# Altium PCB UKU202045.PcbDoc (part 2 of 3)
Units mm, origin at the board's own origin, x right, y up, seen from the top; angles counter-clockwise.
Board outline 319.2 x 161.95 mm, 2 copper layers (Top Layer, Bottom Layer); 290 components, 381 nets, 912 pads, 545 vias.
Unrouted connection lines stored in the file: 1.
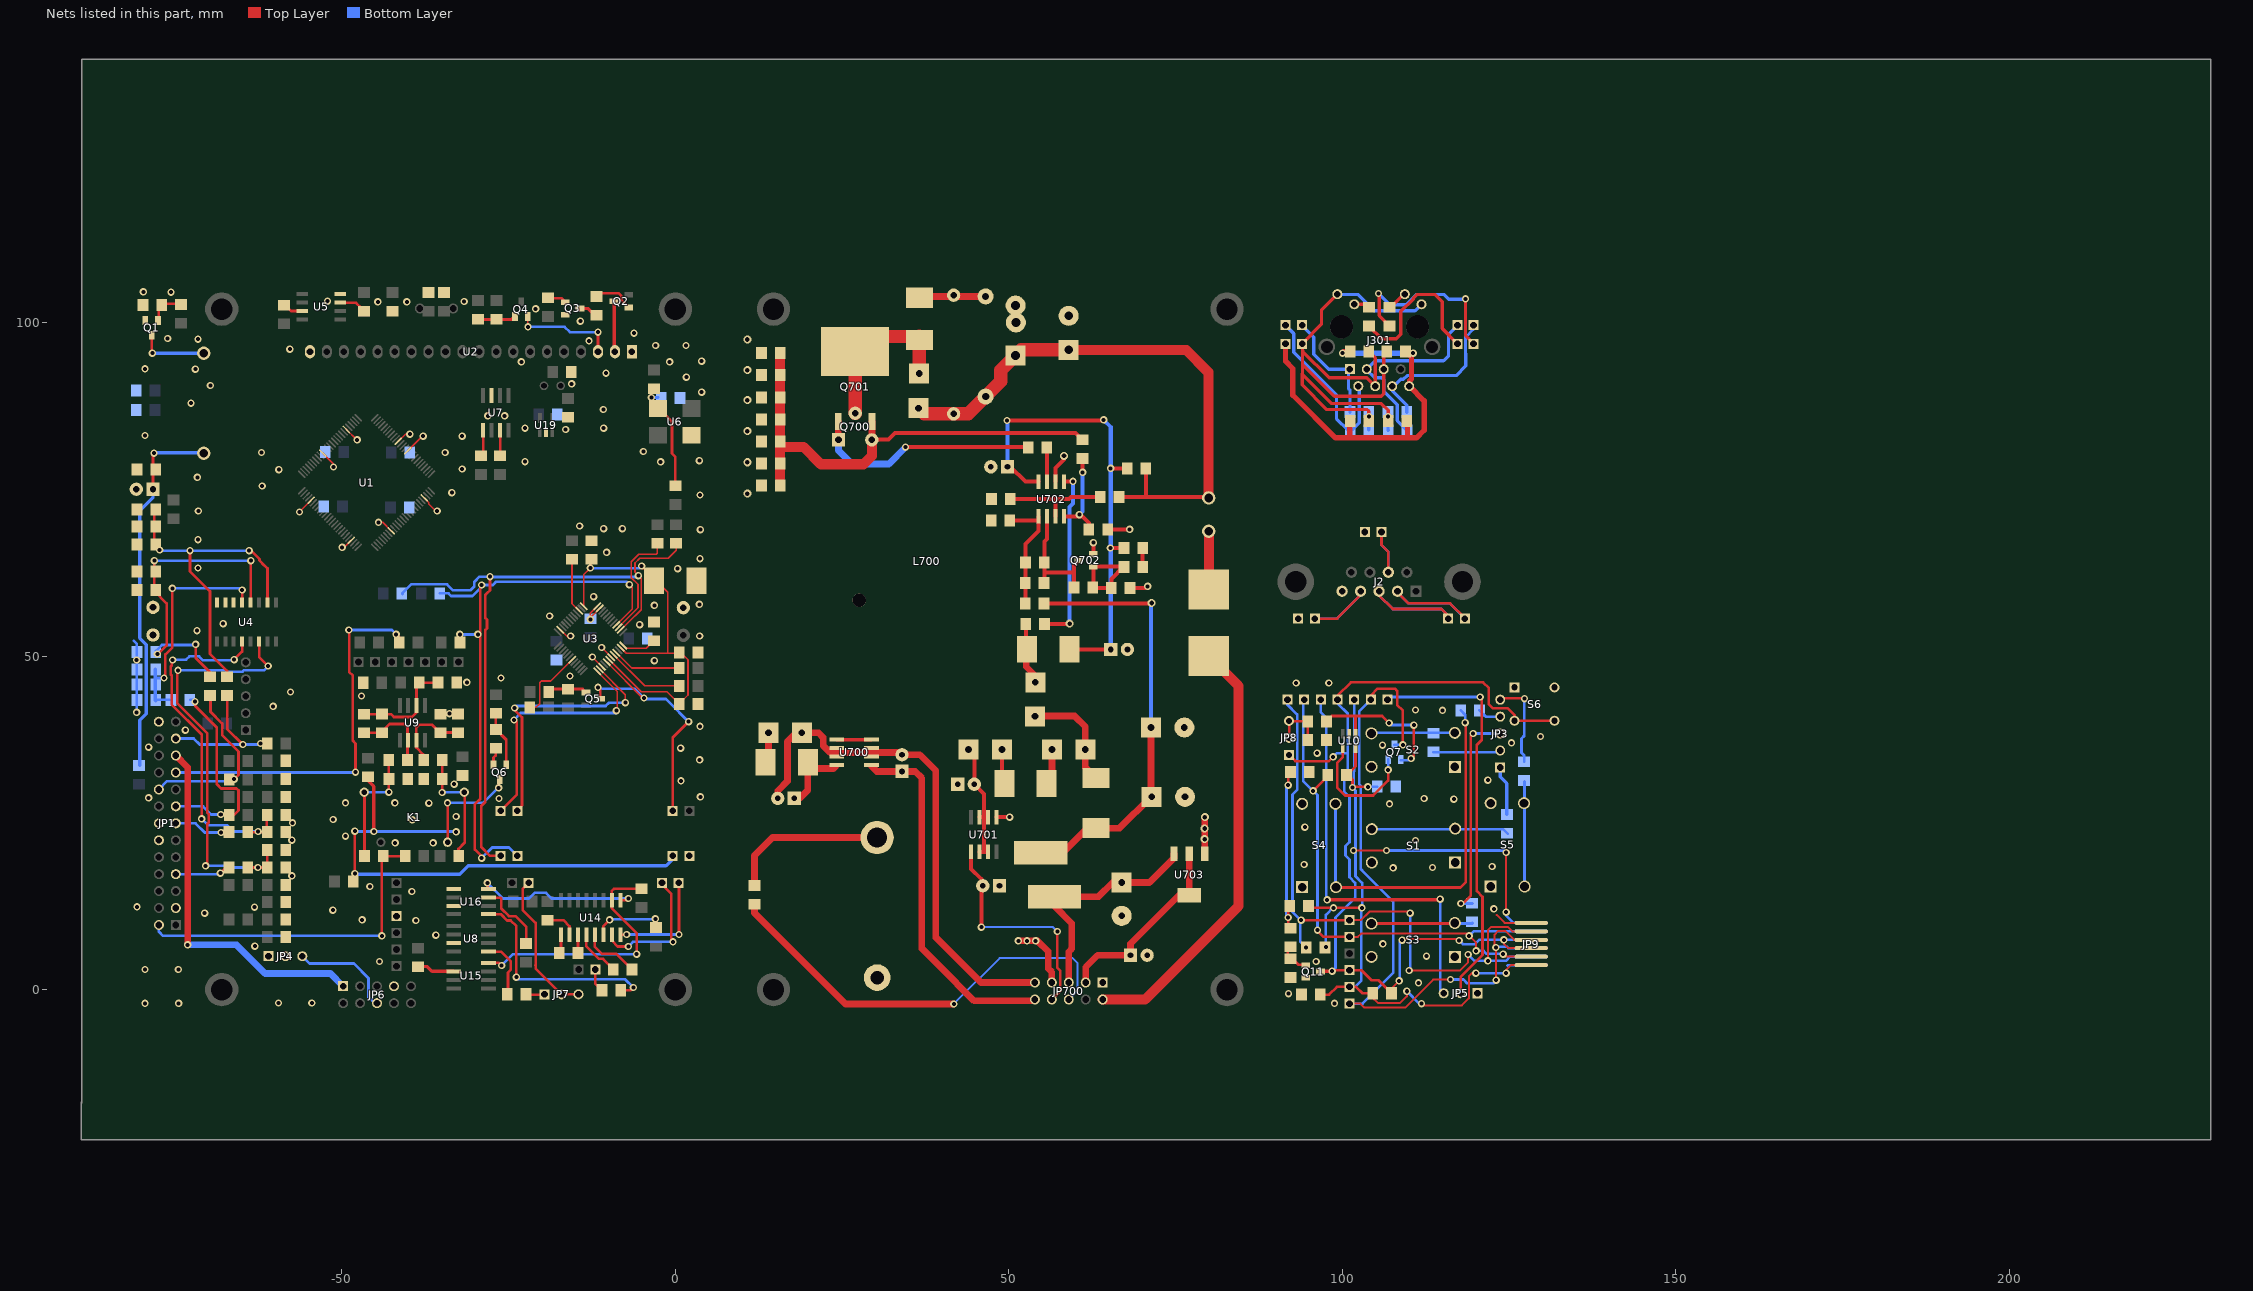
[diagram p2: the nets of this part, all layers, seen from the top]

## Via types
v1: diameter 1.1, hole 0.6, Top Layer to Bottom Layer, 521 vias
v2: diameter 1.2, hole 0.7, Top Layer to Bottom Layer, 12 vias
v3: diameter 1.5, hole 0.95, Top Layer to Bottom Layer, 12 vias

## Nets (pads, with @x,y where several pads share a name; then routed paths per layer and width w, separated by ;. In a path a pad name is that pad's centre, name@x,y a point inside that pad or via, vN(x,y) a via of type N, cw(c..) or ccw(c..) an arc to the next point about the centre after c; other vN are vias at no path point) (continued)
-IAKB: JP1.2 R61.2 R62.2 | length 49.9
  Top Layer w0.4: v1(-44,8.05) -44,19.8 R61.2@-43.85,19.95 ; R61.2@-43.809,19.996 -40.554,19.996 R62.2@-40.55,20
  Bottom Layer w0.4: JP1.2@-77.42,9.685 -77.42,8.67 -76.8,8.05 v1(-44,8.05)
-UOUT: JP1.21 JP6.1 | length 55
  Top Layer w1: JP1.21@-74.9,35.1 -74.895,35.1 JP1.21@-74.88,35.085 -73.1,33.305 v1(-73.1,6.7)
  Bottom Layer w1: v1(-73.1,6.7) -65.8,6.7 -61.5,2.4 -51.7,2.4 JP6.1@-49.8,0.5
AIN2U: 
C0: JP1.14
DT1: JP1.23 R8.2 R17.1 | length 22.6
  Top Layer w0.4: R8.2@-67.197,44.097 -67.197,39.097 v1(-64.85,36.75) ; v1(-62.2,36.9) -62.197,36.903 R17.1@-61.197,36.903
  Bottom Layer w0.4: JP1.23@-74.9,37.6 -74.902,37.603 -74.95,37.65 JP1.23@-74.9,37.65 ; JP1.23@-74.875,37.625 -74.877,37.628 JP1.23@-74.9,37.65 ; v1(-62.2,36.9) -62.35,36.75 v1(-64.85,36.75) -71.3,36.75 -72.2,37.65 -74.88,37.65 JP1.23@-74.9,37.65
DT1U: C6.1 D3.2 R8.1 R26.2 U4.2 | length 51.3
  Top Layer w0.4: R26.2@-78.05,72.05 -78.1,72.05 -78.1,72.003 -78.1,69.388 -78.1,67.05 -77.825,66.775 -77.125,66.075 v1@-77,65.95 ; v1(-72.75,65.8) -72.75,62.7 -69.75,59.7 -69.75,50.3 -67.197,47.747 R8.1@-67.197,46.897 R8.1@-67.25,46.897 ; v1(-63.9,65.8) -63.6,65.8 -62.35,64.55 -62.35,64.35 -61.15,63.15 -61.15,63.1 ; -61.95,63.9 -61.15,63.1 ; U4.2@-61.1,57.95 -61.15,58 -61.15,58.025 -61.15,63.1
  Bottom Layer w0.4: v1@-77,65.95 -76.85,65.8 v1(-72.75,65.8) v1(-63.9,65.8)
  other v1: -77.3,65.9
DT2: JP1.18 R9.2 R18.1 | length 26.5
  Top Layer w0.4: R9.2@-69.697,44.097 -69.697,41.647 -67.95,39.9 -67.95,38.15 -65.5,35.7 -65.5,32.2 v1(-66.15,31.55)
  Bottom Layer w0.4: JP1.18@-77.425,30 -76.175,31.25 -66.45,31.25 v1(-66.15,31.55)
DT2U: C7.1 D4.2 R9.1 R27.2 U4.4 | length 49.6
  Top Layer w0.4: v1(-78.1,64.3) -78.1,62.688 -78.1,62.25 -78.105,62.25 -78.105,59.9 -78.105,59.755 -78.075,59.725 -76.25,57.9 -76.25,51.6 -77.5,50.35 -77.65,50.35 v1@-77.7,50.35 ; v1(-71.9,51.75) -71.9,49.7 -69.697,47.497 -69.697,46.897 R9.1@-69.697,46.85 ; R9.1@-69.65,46.8 R9.1@-69.65,46.897 ; U4.4@-63.665,58.025 v1(-63.65,64.3) -63.65,63.3
  Bottom Layer w0.4: v1(-78.1,64.3) v1(-63.65,64.3) ; R27.2@-77.9,50.75 -77.9,50.7 -77,51.6 -77,51.65 -72,51.65 v1(-71.9,51.75)
  other v1: -77.65,50.3
DTAKB: JP1.15 R11.2 R19.1 | length 31.5
  Top Layer w0.4: v1(-72,43.15) -71.997,42.547 -68.75,39.3 -68.75,30.8 -68.1,30.15 -65.8,30.15 -65.5,29.85 ; v1@-68.2,26.2 v1@-68.197,26.203 ; v1(-68.15,26.25) v1@-68.197,26.203 ; -65.5,29.9 -65.5,29.85 ; v1@-68.197,26.203 -68.15,26.203 R19.1@-66.897,26.203 -66.147,26.203 -65.5,26.85 -65.5,29.85
  Bottom Layer w0.4: JP1.15@-74.88,27.465 -70.815,27.465 -69.6,26.25 v1(-68.15,26.25) ; R11.2@-72.7,43.45 -72.3,43.45 v1(-72,43.15)
DTAKBU: C8.1 D5.2 R11.1 R28.2 U4.5 | length 34.9
  Top Layer w0.4: v1(-76.65,46.7) v1@-76.6,46.75 ; v1@-76.55,46.75 v1@-76.6,46.75 ; v1(-75.4,60.15) -75.4,51.3 -76.45,50.25 -76.45,46.9 -76.575,46.775 v1@-76.6,46.75 ; U4.5@-65,57.9 U4.5@-64.95,57.95 ; U4.5@-64.95,58.025 v1(-64.95,59.9)
  Bottom Layer w0.4: C8.1@-77.95,43.45 -77.903,43.45 -75.7,43.45 R11.1@-75.65,43.4 ; -77.95,46.7 -77.905,46.7 v1@-76.7,46.7 ; v1(-75.4,60.15) -65.2,60.15 v1(-64.95,59.9)
  Bottom Layer w0.5: R28.2@-77.95,48.05 -77.95,47.997 -77.95,46.7 -77.95,45.712 -77.95,43.45 -77.95,43.403 -77.95,43.35 C8.1@-77.9,43.3
GND: C1.2 C2.2 C3.2 C4.2 C5.2 C6.2 C7.2 C8.2 C9.2 C10.2 C11.2 C12.2 C13.2 C14.2 C15.1 C16.1 C17.1 C18.2 C19.2 C20.2 C21.1 C22.1 C23.2 C24.1 C25.1 C31.1 C33.1 C35.2 C37.1 C38.1 C39.1 C40.1 C41.1 C42.2 D3.1 D4.1 D5.1 D7.1 JP1.3 JP1.12 JP1.26 JP4.1 JP6.7 pad.4 pad.9@-78.3,53.15 pad.9@-78.3,57.3 Q1.2 Q3.2 Q6.2 R12.2 R13.2 R15.2 R16.2 R23.1 R24.1 R26.1 R27.1 R28.1 R36.1 R49.1 R57.1 R58.1 R60.1 U1.11 U1.15 U1.31 U1.41 U1.55 U1.72 U1.83 U1.97 U2.1 U2.20 U3.15 U3.19 U3.35 U3.36 U3.47 U4.6 U4.7 U4.8 U5.4 U6.2 U7.3 U8.7 U16.5 U16.7 U19.2 X17.1 | length 43.8
  Top Layer w0.2: U1.41@-52.841,80.419 -51.25,78.829 v1(-51.25,78.35)
  Top Layer w0.25: v1(-56.35,71.6) -56.35,71.607 U1.55@-54.608,73.348 ; v1(-49.95,66.3) -49.636,66.3 U1.72@-48.598,67.338 ; U1.31@-49.305,83.955 -47.75,82.4 v1(-47.7,82.4) ; v1(-44.5,70.05) -43.885,70.05 U1.83@-42.587,68.752 ; U1.15@-41.527,82.187 -40.464,83.25 v1(-39.8,83.25) ; U1.11@-40.113,80.773 -37.936,82.95 v1(-37.8,82.95) ; U1.97@-37.638,73.702 -36.95,73.014 -36.95,72.8 -35.9,71.75 v1(-35.7,71.75) ; U3.47@-17.254,53.948 -16.006,52.7 v1@-15.9,52.7 ; v1@-12.75,55.45 v1(-12.75,55.5) v1@-12.75,55.731 ; v1@-12.449,49.85 U3.15@-10.997,48.398 ; U3.36@-11.704,57.484 -12.75,56.438 v1@-12.75,55.731 ; U3.35@-11.35,57.13 v1@-12.75,55.731 ; v1@-11.05,51.3 v1(-11.05,51.279) U3.19@-9.582,49.812
  Top Layer w0.4: Q6.2@-27.254,33.696 -27.254,34.796 -26.95,35.1 R58.1@-26.95,35.9
  Bottom Layer w0.4: -81.2,52.3 -80.75,51.85 -80.75,50.597 v1(-80.75,49.4) -80.75,47.997 -80.75,45.712 -80.75,43.403 v1(-80.75,41.55) ; C13.2@-12.8,55.55 -12.775,55.525 v1(-12.75,55.5) ; v1(-11.05,51.279) v1@-11.029,51.3
  other v1: -79.499,-2.05 -74.45,-2.05 -59.5,-2 -54.5,-2 -79.5,3 -74.5,3 -44.35,4.2 -63.05,6.5 -35.9,8.15 -38.9,10.35 -46.95,10.45 -70.55,11.45 -51.35,11.9 -63.099,12.35 -80.699,12.4 -39.5,14.7 -45.8,15.45 -57.5,17.05 -42,22 -36.3,22 -57.5,22.4 -49.45,23 -57.4,25 -39.45,25.45 -51.3,25.5 -32.85,25.95 -36.95,27.95 -49.45,28 -42.05,28 -26.45,28.65 -78.95,28.75 3.75,28.9 -33.15,30.8 0.85,31.3 3.65,34.45 0.8,36.2 -78.95,36.35 -73.45,38.9 3.7,39.45 -33.85,41.35 -60.299,42.45 -47.05,44 -57.7,44.6 -31.25,46.05 -26.15,46.7 -15.8,47 -3.15,49.3 -12.45,49.85 -15.7,53 3.65,53 -71.7,53.8 -5.35,54.7 -67.8,54.85 -18.85,56 -3.15,57.6 3.6,57.75 -12.25,58.9 0.35,63.1 -71.55,63.2 3.7,64.6 -10.3,65.55 -71.55,67.45 3.75,68.95 -10.75,69.1 -7.95,69.1 -14.35,69.5 -71.5,71.75 3.7,74.15 -33.5,74.5 -61.95,75.5 -71.65,76.8 -59.45,77.95 -31.95,78.05 -2.2,79.1 -22.55,79.15 3.6,79.3 -62.05,80.5 -34.5,80.5 -4.8,80.65 -31.95,82.95 -79.5,83.05 -16.45,83.95 -22.55,84.15 -10.75,84.15 -28.1,86 -25.6,86 -10.8,86.95 -72.6,87.9 3.95,89.55 -69.7,90.55 -15.55,90.8 1.65,91.8 -10.4,92.4 -71.95,93 -79.5,93.05 -23.1,94.1 -0.85,94.1 3.95,94.2 -57.8,96 -2.95,96.55 1.6,96.55 -12.95,97.25 -71.55,97.5 -76.099,97.6 -6.2,98.4 -14.25,100.2 -20.95,102.05 -44.6,103.1 -40.25,103.1 -31.65,103.15 -52.15,103.2 -75.6,104.55 -79.75,104.6
GND_P: BT700.2 C702.2 C703.2 C704.1 C705.1 C706.2 C710.2 C711.2 C712.2 C714.2 C715.2 D702.2 JP700.1 JP700.7 L700.7 pad.0@51.05,100 pad.1 Q702.2 R707.1 R709.1 R710.2 R711.2 R712.2 R713.2 R714.2 R715.2 R716.2 R717.1 U701.5 U702.6 U703.1 | length 35.1
  Top Layer w0.6: U701.5@48.162,25.839 v1@50.094,25.839 ; U702.6@56.992,76.139 56.992,78.188 58.255,79.45 v2(58.255,80) ; Q702.2@62.654,65.302 v1(62.655,67) ; C714.2@64.792,68.993 v1@68.098,68.993 ; R717.1@68.159,60.207 70.562,60.207 v1(70.805,60.45)
  Top Layer w1: v1@51.398,7.307 v1(51.405,7.3) 54.305,7.3 55.892,5.712 55.892,3.162 56.435,2.62 JP700.7@56.435,1.05 ; D702.2@55.664,30.894 56.455,31.685 L700.7@56.455,36 ; U703.1@79.355,20.35 v2@79.355,25.921
  Bottom Layer w0.6: v1@51.398,7.307 v1(51.405,7.3)
  other v1: 52.705,7.3 54.005,7.3 50.105,25.85 68.105,69
  other v2: 79.352,22.557 79.355,24.157 79.368,25.85 10.8,74.35 10.8,79.05 10.8,83.7 10.8,88.35 10.8,92.85 10.8,97.45
I1: JP1.13 R6.2 | length 8.5
  Top Layer w0.4: v1(-68.1,23.55) -68,23.65 R6.2@-67,23.65
  Bottom Layer w0.4: JP1.13@-74.88,24.925 -71.925,24.925 -70.55,23.55 v1(-68.1,23.55)
I2: JP1.7 R7.2 | length 8.4
  Top Layer w0.4: v1(-68.2,17.45) -67.353,18.297 R7.2@-66.903,18.297
  Bottom Layer w0.4: JP1.7@-74.88,17.305 -68.345,17.305 v1(-68.2,17.45)
IU1: C4.1 R6.1 R23.2 U4.12 | length 53.9
  Top Layer w0.4: v1@-75.5,49.45 -75.5,49.4 -75.5,48.55 -75.65,48.4 -75.65,47.25 -75.5,47.1 -75.5,42.75 -71,38.25 v1(-71,25.6) ; v1(-66.15,49.45) -64.935,50.665 U4.12@-64.935,52.175 U4.12@-64.95,52.16 ; R6.1@-64.103,23.597 v1@-62.65,23.597 ; v1(-62.547,23.7) v1@-62.65,23.597 ; C4.1@-61.25,26.25 -61.25,26.2 -61.25,23.7 -61.2,23.65 -61.203,23.65 -61.25,23.65 -61.253,23.647 -61.303,23.597 -62.547,23.597 v1@-62.65,23.597
  Bottom Layer w0.4: v1@-75.5,49.45 -75.35,49.45 -73.35,49.45 -72.85,49.95 -71.4,49.95 ; -71.35,49.95 -71.4,49.95 ; v1(-71,25.6) -70.05,24.65 -67.25,24.65 -66.3,23.7 v1(-62.547,23.7) ; v1(-66.15,49.45) -66.25,49.35 -70.8,49.35 -71.4,49.95
  other v1: -75.35,49.4
IU2: C5.1 R7.1 R24.2 U4.14 | length 63.2
  Top Layer w0.4: v1(-74.55,47.85) -74.65,47.75 -74.65,42.9 -70.15,38.4 -70.15,26.5 -69.95,26.3 -69.95,25.05 -70.15,24.85 -70.15,18.8 v1(-70.4,18.55) ; R7.1@-64.103,18.297 v1(-62.6,18.297) ; v1@-62.65,18.35 -62.6,18.35 v1(-62.6,18.297) ; U4.14@-62.395,52.175 -62.395,49.845 v1(-61.05,48.5) ; C5.1@-61.2,20.9 -61.2,18.4 -61.253,18.347 -61.303,18.297 v1(-62.6,18.297)
  Bottom Layer w0.4: v1(-74.55,47.85) -67.4,47.85 ; v1(-70.4,18.55) -67.5,18.55 -67.247,18.297 v1(-62.6,18.297) ; -67.45,47.9 -67.4,47.85 ; v1(-61.05,48.5) -61.7,47.85 -64.7,47.85 -64.9,47.65 -67.2,47.65 -67.4,47.85
N000: JP9.5 JP9.8 Q7.3 X43.1 X44.1 | length 109.8
  Top Layer w0.3: X44.1@101.05,-2.1 102.7,-2.1 103.3,-2.7 109.4,-2.7 113.6,1.5 v1(116.2,1.5) ; v1@123,1.75 v1(123,6.3) 122.8,6.5 122.8,8.25 123.3,8.75 124.45,8.75 125.75,7.45 JP9.5@128.3,7.45
  Top Layer w0.4: X43.1@104.25,43.45 104.25,44.1 105.25,45.1 107.85,45.1 108.2,44.75 108.2,42.65 109.048,41.802 v1(109.048,36.698)
  Bottom Layer w0.4: X44.1@101.05,-2.1 103,-2.1 107.6,2.5 107.6,13.2 102.95,17.85 102.75,18.05 102.75,30.55 102.5,30.8 102.5,41.7 X43.1@104.25,43.45 ; Q7.3@107.798,36.698 v1(109.048,36.698) ; v1(116.2,1.5) 118.15,1.5 118.7,0.95 122.65,0.95 v1@122.95,1.25 ; v1@122.75,1.5 122.85,1.6 v1@122.95,1.7 ; v1(123,6.3) 123.1,6.4 124.7,6.4 124.9,6.2 JP9.8@128.3,6.2
  other v1: 123.05,1.4
NetA1_1: A1.1 Q1.3 | length 10.5
  Top Layer w0.4: Q1.3@-78.5,98.15 Q1.3@-78.5,98.1 -78.5,95.5 v1(-78.4,95.4)
  Bottom Layer w0.5: v1(-78.4,95.4) A1.1@-70.7,95.4
NetA1_2: A1.2 C19.1 R56.1 R57.2 | length 56
  Top Layer w0.4: C19.1@-78.3,75 -78.3,78 -78.3,80.25 v1(-78.15,80.4)
  Bottom Layer w0.5: R56.1@-80.3,33.6 -80.3,37.55 -80.3,40.35 -79.3,41.35 -79.3,42.55 -79.3,51.7 -80.3,52.7 -80.3,53.85 -80.3,71.8 -78.3,73.8 C19.1@-78.3,75 ; v1(-78.15,80.4) -78.1,80.45 A1.2@-70.7,80.45
NetBT700_1: BT700.1 D703.1 | length 24
  Top Layer w1: D703.1@11.864,15.595 11.864,20.109 14.549,22.795 BT700.1@30.245,22.795
NetC9_1: C9.1 C10.1 C11.1 C20.1 U3.18 U3.23 U3.37 | length 62.2
  Top Layer w0.25: U3.37@-13.719,57.484 -13.719,62.231 v1@-12.85,63.1 ; v1@-12.975,63.125 -12.871,63.228 -12.825,63.275 -12.597,63.502 C11.1@-12.597,64.488 ; v1@-12.95,63.1 v1@-12.85,63.1 ; v1@-12.793,63.15 v1@-12.796,63.153 ; v1(-12.75,63.2) v1@-12.796,63.153 ; U3.18@-9.936,49.458 -5.128,44.65 -1.264,44.65 C10.1@0.589,42.798 ; U3.23@-8.168,51.226 -7.342,50.4 -1.15,50.4 ; v1(-5.05,63.5) -5.15,63.5 -5.1,63.45 -3.083,61.433 -2.65,61 C20.1@-2.65,60.95 ; C20.1@-2.91,61.306 -2.602,60.998 -1.15,59.545 -1.15,50.4 ; C9.1@0.5,50.45 C9.1@0.541,50.45 ; C9.1@0.589,50.498 C9.1@0.541,50.45 ; C10.1@0.65,42.9 1.9,44.15 1.9,49.45 0.9,50.45 0.589,50.45 C9.1@0.541,50.45 ; v1@-12.85,63.1 v1@-12.796,63.153 ; -1.15,50.4 0.491,50.4 C9.1@0.541,50.45
  Bottom Layer w0.4: v1@-12.781,63.169 -12.75,63.169 -5.4,63.15 v1(-5.05,63.5)
NetC18_1: C18.1 R50.1 R51.1 U6.4 | length 17
  Top Layer w0.4: U6.4@-3.6,86.85 -3.6,87.1 v1(-3.6,88.75) -3.6,89.7 -3.202,90.097 R50.1@-3.2,90.1 ; U6.4@-2.4,87.05 -0.5,85.15 -0.5,80.35 -0.004,79.854 R51.1@-0.004,75.509
  Bottom Layer w0.4: v1(-3.6,88.75) -2.65,88.75 C18.1@-2.6,88.8
NetC22_2: C22.2 K1.3 R61.1 R64.1 | length 18.2
  Top Layer w0.4: K1.3@-46.7,29.65 -46.642,29.592 -46.609,29.559 R61.1@-46.609,19.996 ; R64.1@-42.959,34.396 -42.95,34.387 -42.95,31.604 v1(-42.95,29.6)
  Bottom Layer w0.4: K1.3@-46.642,29.592 -42.958,29.592 v1(-42.95,29.6)
NetC23_1: C23.1 K1.1 R63.1 R65.1 | length 18.4
  Top Layer w0.4: v1(-34.95,29.55) -34.95,31.604 -34.95,34.404 R65.1@-34.95,34.5 ; R63.1@-32.5,19.85 -32.5,20.004 -32.5,21.1 -31.591,22.009 -31.591,29.491 K1.1@-31.65,29.55
  Bottom Layer w0.4: v1(-34.95,29.55) -34.91,29.59 K1.1@-31.644,29.59
NetC24_2: C24.2 C32.2 R59.1 R66.1 U9.6 | length 15.7
  Top Layer w0.4: C32.2@-46.646,41.291 -44.003,41.291 -42.641,41.291 -42.2,40.85 -39.5,40.85 -38.8,41.55 -38.8,42.58 -38.8,45.594 R66.1@-38.387,46.007 -35.594,46.007 C24.2@-35.591,46.004 ; C24.2@-35.553,45.997 C24.2@-35.55,46
NetC26_1: C26.1 U14.3 | length 2.6
  Top Layer w0.4: C26.1@-14.65,5.6 -14.605,5.645 U14.3@-14.605,8.2
NetC26_2: C26.2 U14.1 | length 2.8
  Top Layer w0.4: C26.2@-17.35,5.5 -17.145,5.705 U14.1@-17.145,8.2
NetC27_1: C27.1 U14.2 | length 5
  Top Layer w0.4: C27.1@-19.2,10.4 -16.8,10.4 -15.875,9.475 U14.2@-15.875,8.2
NetC29_1: C29.1 U14.4 | length 7.2
  Top Layer w0.4: U14.4@-13.335,8.2 -13.335,6.485 -11.45,4.6 -10.85,4.6 C29.1@-9.3,3.05
NetC29_2: C29.2 U14.5 | length 8.8
  Top Layer w0.4: U14.5@-12.065,8.2 -12.065,6.415 -11,5.35 -8.85,5.35 C29.2@-6.5,3
NetC30_1: C30.1 U14.6 | length 11.1
  Top Layer w0.4: U14.6@-10.8,8.15 -10.8,8.2 -10.8,9.5 v1(-9.85,10.45) ; v1(-3,10.6) -2.9,10.5 C30.1@-2.9,9.3 C30.1@-2.9,9.1
  Bottom Layer w0.4: v1(-9.85,10.45) -9.75,10.55 -3.05,10.55 v1(-3,10.6)
NetC32_1: C32.1 R59.2 R64.2 U9.2 | length 12.1
  Top Layer w0.4: C32.1@-46.6,38.5 -44.15,38.5 -44.072,38.578 -42.85,39.8 -40.65,39.8 -40.159,39.309 -40.159,37.38 R64.2@-40.159,34.396
NetC34_1: C34.1 C43.1 C44.2 D2.1 JP5.1 JP9.1 JP9.12 Q11.2 R79.1 S1.1 S2.1 S3.1 S4.1 S5.1 S6.1 U10.2 | length 9.3
  Top Layer w0.3: 123.1,11.2 124.3,10 JP9.1@128.3,10
  Bottom Layer w0.4: 124.75,3.6 124.8,3.65 JP9.12@128.3,3.65
  other v1: 98.8,-2.05 91.9,-0.6 111.4,1 96.05,4.2 112.6,5 106.05,6.85 122.7,12.1 107.6,18.25 113.5,18.3 122.45,18.45 94.25,18.75 110.95,22.35 94.35,24.35 107.05,27.85 116.7,28.55 112.25,28.65 121.8,31.4 96.2,35.45 106,36.65 125.35,37 129.7,37.95 115,41.85 110.95,41.9 93.05,45.95 97.95,45.95
NetC34_2: C34.2 C36.2 C44.1 JP9.2 JP9.11 R46.2 R81.1 R82.1 U10.5 X39.1 X40.1 | length 147.9
  Top Layer w0.3: v1(101.65,20.85) v1(106.6,20.85) ; R81.1@104.5,-0.55 104.5,-1.2 105.3,-2 108.65,-2 109.65,-1 v1(109.65,-0.25) ; v1(111.85,-2.1) 112.1,-2.35 117.9,-2.35 118.95,-1.3 118.95,2 119.4,2.45 v1(120,2.45) ; v1(124.55,2.45) 124.55,2.95 125.25,3.65 JP9.11@128.3,3.65 ; v1(124.55,11.6) v1(124.55,20.55)
  Top Layer w0.4: C36.2@94.6,12.55 94.775,12.375 94.9,12.25 v1(102.9,12.25) ; C34.2@96.65,-0.75 98,-0.75 99.15,0.4 X40.1@101.05,0.4 102.05,0.4 103,-0.55 R81.1@104.5,-0.55 ; R82.1@100.65,32.15 101.95,33.45 U10.5@101.95,36.225 ; v1(101.5,30.3) 101.6,30.4 v1(103.8,30.4)
  Top Layer w0.5: R46.2@97.379,6.294 97.445,6.294 v1(97.5,6.35) ; v1@98.6,12.25 v1(98.65,12.25) ; R82.1@100.65,32.3 101.5,31.45 v1(101.5,30.3)
  Bottom Layer w0.4: v1(97.5,6.35) 97.5,11.2 98.65,12.35 v1(98.65,12.25) ; X40.1@101.05,0.4 101.9,0.4 102.8,1.3 102.8,12.15 102.95,12.3 102.95,15.99 101.95,16.99 101.95,29.85 v1(101.5,30.3) ; v1@101.65,30.2 101.7,30.25 101.7,30.3 101.7,32.7 101.75,32.75 X39.1@101.75,43.45 ; v1(103.8,30.4) 103.95,30.4 103.957,30.407 C44.1@105.192,30.407 ; v1(106.6,20.85) 124.25,20.85 v1(124.55,20.55) ; v1(109.65,-0.25) 111.5,-2.1 v1(111.85,-2.1) ; v1(120,2.45) v1(124.55,2.45) ; v1(124.55,11.6) 124.55,11.1 125.65,10 JP9.2@128.3,10
NetC35_1: C35.1 R60.2 R65.2 U9.3 | length 12.4
  Top Layer w0.4: R65.2@-37.8,34.3 -37.8,34.404 -37.8,35.25 -38.825,36.275 -38.825,37.38 -38.825,39.325 -38.45,39.7 -36.45,39.7 -35.3,38.55 -35.197,38.55 -32.554,38.55 -32.55,38.55 R60.2@-32.55,38.6
NetC36_1: C36.1 D2.2 R80.2 | length 25.4
  Top Layer w0.4: v1@91.75,30.7 91.775,30.725 91.85,30.8 91.85,32.6 D2.2@91.85,32.65 ; C36.1@91.85,12.55 91.85,12.5 91.85,10.8 91.85,9.25 R80.2@91.9,9.2
  Bottom Layer w0.4: v1@91.75,30.7 91.6,30.55 91.6,11.05 v1(91.85,10.8)
  other v1: 91.85,30.65
NetC43_2: C43.2 JP8.2 JP8.3 R74.2 | length 8.1
  Top Layer w0.4: JP8.2@92,37.74 JP8.3@92,40.28 92.072,40.207 R74.2@94.808,40.207 94.8,40.2 C43.2@94.8,37.5
NetC301_1: C301.1 C302.1 C303.1 C304.1 J301.8 X306.1 | length 61
  Top Layer w0.8: X306.1@91.45,96.8 91.45,94.2 92.55,93.1 92.55,89.1 98.95,82.7 101.1,82.7 ; v1(100,95.4) 100.2,95.6 C302.1@101.15,95.6 ; C303.1@101.15,85.1 101.1,85.05 101.1,82.7 ; C301.1@109.55,95.65 109.55,95.6 110.175,94.975 110.35,94.8 110.35,91.55 110.05,91.25 110.05,90.45 112.25,88.25 112.25,83.85 111.1,82.7 109.75,82.7 ; C304.1@109.75,85.05 109.75,82.7 ; v1@110.5,95.35 110.5,95.3 v1(110.6,95.4) ; 101.1,82.7 109.75,82.7
  Bottom Layer w0.8: v1(100,95.4) 110.55,95.4 110.575,95.375 110.6,95.35 v1(110.6,95.4)
NetC301_2: C301.2 C302.2 C303.2 C304.2 J301.4 J301.5 J301.9 J301.12 R301.2 R302.1 R303.2 R304.1 X301.1 | length 104.2
  Top Layer w0.5: 93.95,92.35 93.95,90.65 97.65,86.95 103.725,86.95 103.938,86.738 C303.2@103.938,85.95 ; X301.1@93.95,96.8 96.85,99.7 96.85,101.86 J301.9@99.24,104.25 ; 94,93.7 94,92.25 98.4,87.85 105.85,87.85 106.85,86.85 v1(106.85,85.9) C304.2@106.85,85.25 ; X301.1@94,96.75 94,95.8 ; 94.05,95.8 94,95.8 ; C302.2@103.95,95.65 104.915,94.685 J301.4@104.915,90.45 103.665,91.7 98,91.7 94,95.7 ; C301.2@106.7,95.75 106.625,95.675 106.185,95.235 J301.5@106.185,93 106.185,89.285 105.85,88.95 98.8,88.95 94,93.75 94,95.7 ; 94,95.7 94,95.8
  Bottom Layer w0.5: J301.9@99.15,104.2 99.24,104.2 102.3,104.2 104.75,101.75 110.88,101.75 J301.12@111.86,102.73 ; J301.9@99.2,104.25 J301.9@99.22,104.27 ; R301.2@103.938,86.557 103.938,85.9 103.938,83.912 R302.1@103.95,83.9 ; R304.1@106.838,86.557 106.838,85.9 106.838,83.862 106.86,83.84 R303.2@106.9,83.8
  other v1: 103.95,85.9
NetC700_1: C700.1 D700.2 U700.8 | length 10
  Top Layer w1: C700.1@17.843,28.658 18.613,28.658 19.864,29.909 19.864,33.15 23.705,33.15 U700.8@24.005,33.45
NetC700_2: C700.2 C701.2 JP700.9 L700.9 U700.2 U700.3 U700.6 U700.7 | length 77.6
  Top Layer w1: C700.2@15.343,28.658 15.343,29.789 16.805,31.25 16.805,37.2 18.105,38.5 21.455,38.5 22.155,37.8 22.155,36.6 23.205,35.55 33.628,35.55 C701.2@33.974,35.204 36.651,35.204 39.055,32.8 39.055,7.8 45.805,1.05 JP700.9@53.895,1.05
NetC701_1: C701.1 JP700.10 U700.1 | length 53.8
  Top Layer w1: U700.1@29.455,33.45 30.201,32.704 35.951,32.704 36.955,31.7 36.955,6.15 39.569,3.535 44.792,-1.688 JP700.10@53.697,-1.688
NetC702_1: C702.1 C703.1 D701.2 D706.2 R700.2 U702.8 | length 71.8
  Top Layer w0.6: v1(49.705,85.3) v1@64.105,85.3 ; C703.1@50.255,78.35 52.465,76.139 U702.8@54.452,76.139 ; D701.2@59.066,50.992 C702.1@65.266,50.992 ; v1@65.305,78.099 R700.2@67.723,78.099 ; v1@65.306,66.199 D706.2@67.249,66.199
  Bottom Layer w0.6: C703.1@49.793,78.358 v1@49.793,85.211 ; v1(64.205,85.4) 65.266,84.339 C702.1@65.266,50.992
  other v1: 65.205,66.2 65.255,78.15
NetC704_2: C704.2 L700.5 U701.2 U701.3 U701.6 U701.7 | length 18.9
  Top Layer w0.6: L700.5@43.955,36 44.816,35.139 C704.2@44.816,30.792 46.255,29.353 46.255,20.639 ; U701.2@45.622,20.639 U701.3@46.892,20.639 ; U701.7@45.622,25.839 U701.6@46.892,25.839
NetC705_2: C705.2 JP700.8 U701.1 | length 34.5
  Top Layer w0.4: JP700.8@56.435,-1.49 57.705,-0.22 57.705,2.8 57.255,3.25 v1(57.255,8.7)
  Top Layer w0.6: U701.1@44.352,20.639 44.352,18.052 45.855,16.55 v1(45.855,9.35)
  Bottom Layer w0.3: v1(45.855,9.35) 56.605,9.35 v1(57.255,8.7)
NetC706_1: C706.1 JP700.5 L701.1 U703.3 | length 35.1
  Top Layer w1: JP700.5@58.975,1.05 58.975,5.67 59.405,6.1 59.405,9.95 56.83,12.525 L701.1@56.83,13.928 63.433,13.928 65.556,16.051 71.056,16.051 74.755,19.75 U703.3@74.755,20.35
NetC707_1: C707.1 C713.2 Q702.3 R703.1 U702.2 | length 18.9
  Top Layer w0.6: R703.1@55.317,61.007 55.317,67.162 55.722,67.568 U702.2@55.722,70.939 ; 55.317,62.5 59.747,62.5 ; C707.1@59.747,60.242 59.747,63.645 Q702.3@60.454,64.352
NetC707_2: C707.2 D707.1 Q702.1 R717.2 | length 14.4
  Top Layer w0.6: C707.2@62.654,60.201 Q702.1@62.654,63.402 67.204,63.402 65.359,61.557 R717.2@65.359,60.207 C707.2@62.662,60.207
NetC709_1: C709.1 D704.2 R701.2 | length 10
  Top Layer w1: D704.2@36.606,103.709 36.796,103.9 C709.1@46.5,103.9
NetC709_2: C709.2 C712.1 L700.1 pad.2 R700.1 R701.1 R705.2 R718.1 | length 86.1
  Top Layer w0.6: R705.2@66.492,73.843 R718.1@79.361,73.843 ; 70.523,73.862 R700.1@70.523,78.099
  Top Layer w1.5: pad.2@58.952,95.9 76.605,95.9 79.9,92.55 ; R718.1@79.949,73.704 79.949,92.555
  Top Layer w2: L700.1@36.455,87.15 37.292,86.313 43.913,86.313 48.8,91.2 48.8,92.85 51.85,95.9 pad.2@58.952,95.9
NetC710_1: C710.1 C711.1 D705.2 L701.2 R706.1 | length 65
  Top Layer w0.6: R706.1@55.267,57.907 v2@71.361,57.907
  Top Layer w1: L701.2@54.905,20.3 57.905,20.3 61.805,24.2 66.605,24.2 71.3,28.895 C711.1@71.3,39.286
  Bottom Layer w0.6: C711.1@71.3,39.286 v2@71.3,57.845
  other v2: 71.405,57.95
NetC713_1: C713.1 R703.2 R706.2 R707.2 U702.1 | length 18.1
  Top Layer w0.6: R707.2@50.142,70.293 U702.1@54.396,70.293 ; R706.2@52.492,57.862 52.492,66.788 54.452,68.748 U702.1@54.452,70.939
NetC714_1: C714.1 R708.2 U702.4 | length 14.4
  Top Layer w0.6: U702.4@58.365,70.939 60.294,70.939 v1(60.555,71.2) ; 59.805,70.939 61.015,70.939 61.992,69.962 C714.1@61.992,68.993 ; v1@61.048,77.657 R708.2@61.048,79.612
  Bottom Layer w0.6: v1(60.555,71.2) 61.055,71.7 v1(61.055,77.55)
NetC715_1: C715.1 JP700.3 U703.2 U703.4 | length 29.5
  Top Layer w1: JP700.3@61.515,1.05 61.515,3.36 63.296,5.142 C715.1@68.216,5.142 68.216,6.861 75.505,14.15 U703.4@77.055,14.15 ; U703.4@77.055,14.2 U703.2@77.055,20.35
NetD105_2: 
NetD700_1: D700.1 L700.10 | length 4.6
  Top Layer w1: D700.1@13.514,34.094 13.955,34.535 L700.10@13.955,38.5
NetD701_1: D701.1 L700.4 R702.1 | length 9.3
  Top Layer w0.6: D701.1@52.542,51.032 R702.1@52.542,54.793
  Top Layer w1: D701.1@52.605,50.994 52.605,48.4 53.955,47.05 L700.4@53.955,46.05
NetD702_1: D702.1 L700.6 | length 5.3
  Top Layer w0.6: L700.6@48.955,36 48.955,31.254 D702.1@49.314,30.894
NetD703_2: D703.2 JP700.6 | length 64.5
  Top Layer w1: D703.2@11.864,12.795 11.864,11.491 23.504,-0.149 25.505,-2.15 v1(41.755,-2.15)
  Bottom Layer w0.3: v1(41.755,-2.15) 48.605,4.7 59.555,4.7 60.255,4 60.255,-0.21 JP700.6@58.975,-1.49
NetD704_1: D704.1 L700.2 Q700.2 Q701.4 | length 25.3
  Top Layer w2: Q700.2@26.943,86.411 26.943,95.389 29.464,97.909 D704.1@36.66,97.909 ; L700.2@36.555,92.35 D704.1@36.555,97.95
NetD705_1: D705.1 L700.3 L700.8 | length 17
  Top Layer w1: L700.3@53.905,41 59.85,41 61.455,39.395 L700.8@61.455,36 ; L700.8@61.455,36.45 61.455,33.3 D705.1@63.055,31.7
NetD706_1: D706.1 D707.2 | length 2.8
  Top Layer w0.6: D707.2@70.055,63.351 D706.1@70.055,66.193
NetFU700_1: FU700.1 JP700.2 | length 65.5
  Top Layer w1.5: JP700.2@64.055,-1.49 70.425,-1.49 84.419,12.504 84.419,45.54 FU700.1@79.958,50.001
NetFU700_2: FU700.2 R718.2 | length 8.7
  Top Layer w1.5: FU700.2@79.958,60.001 R718.2@79.958,68.695
NetJ2_2: J2.2 X5.1 | length 23.9
  Top Layer w0.4: J2.2@108.261,59.716 108.261,59.539 109.9,57.9 116.15,57.9 118.35,55.7 X5.1@118.35,55.6
  Bottom Layer w0.4: J2.2@108.25,59.7 108.25,59.55 109.9,57.9 116.1,57.9 118.35,55.65 X5.1@118.35,55.6
NetJ2_3: J2.3 X9.1 | length 25.4
  Top Layer w0.4: J2.3@105.491,59.716 105.491,59.109 107.55,57.05 114.85,57.05 115.85,56.05 X9.1@115.85,55.6
  Bottom Layer w0.4: J2.3@105.5,59.75 105.5,59.716 105.5,59.1 107.55,57.05 114.85,57.05 115.85,56.05 X9.1@115.85,55.6
NetJ2_4: J2.4 X11.1 | length 17.8
  Top Layer w0.4: X11.1@95.85,55.6 99.2,55.6 102.721,59.121 J2.4@102.721,59.716
  Bottom Layer w0.4: X11.1@95.85,55.6 99.2,55.6 102.721,59.121 J2.4@102.721,59.716
NetJ2_5: J2.5 X13.1 X15.1
NetJ2_7: J2.7 X7.1 | length 12.9
  Top Layer w0.4: X7.1@105.85,68.6 105.85,66.65 106.876,65.624 J2.7@106.876,62.556
  Bottom Layer w0.4: X7.1@105.85,68.6 105.85,66.65 106.876,65.624 J2.7@106.876,62.556
NetJ301_1: J301.1 R301.1 X302.1 | length 18.1
  Bottom Layer w0.5: X302.1@93.9,99.65 93.9,99.6 93.925,99.575 95.7,97.8 95.7,95.25 97.95,93 J301.1@101.105,93 ; J301.1@101.1,92.95 100.9,92.75 100.9,90.1 101.138,89.862 R301.1@101.138,86.557
NetJ301_2: J301.2 R302.2 X303.1 | length 27.4
  Bottom Layer w0.5: X303.1@91.45,99.6 92.7,98.35 92.7,95.55 99.1,89.15 99.1,85.6 100.857,83.843 R302.2@101.163,83.843 ; R302.2@101.2,83.8 101.35,83.8 102.5,84.95 102.5,90.3 102.363,90.437 J301.2@102.3,90.5
NetJ301_3: J301.3 R303.1 X304.1 | length 30.5
  Bottom Layer w0.5: R303.1@109.663,83.843 108.2,85.306 108.2,87.7 106.2,89.7 106.2,91.4 105.9,91.7 104.85,91.7 103.6,92.95 103.648,92.997 104.9,94.25 115.15,94.25 115.9,95 115.9,98.25 X304.1@117.25,99.6
NetJ301_6: J301.6 R304.2 X305.1 | length 23.7
  Bottom Layer w0.4: 118.45,95.3 118.45,97.85 ; 118.5,97.85 119.6,98.95 119.6,99.55 X305.1@119.65,99.6 X305.1@119.6,99.6
  Bottom Layer w0.5: R304.2@109.638,86.557 109.638,87.612 107.455,89.795 J301.6@107.455,90.45 107.7,90.45 108.75,91.5 109.15,91.5 109.7,92.05 117.05,92.05 118.5,93.5 118.5,95.3
NetJ301_10: J301.10 R305.1 | length 2.2
  Top Layer w0.5: J301.10@101.78,102.73 103.42,102.73 R305.1@103.8,102.35
NetJ301_11: J301.11 R306.1 | length 3.1
  Top Layer w0.5: R306.1@107.044,102.262 107.263,102.262 J301.11@109.3,104.3
NetJP3_1: JP3.1 R1.2 | length 7.5
  Bottom Layer w0.5: JP3.1@123.65,33.35 JP3.1@123.65,33.3 123.65,31.9 124.65,30.9 R1.2@124.65,26.25
NetJP3_2: JP3.2 R2.2 | length 10.1
  Bottom Layer w0.4: R2.2@113.65,35.6 123.41,35.6 JP3.2@123.65,35.84
NetJP3_3: JP3.3 R3.2 | length 32.3
  Top Layer w0.4: v1(117.75,12.9) 118.05,12.9 119.25,14.1 119.25,38.05 v1(119.6,38.4)
  Bottom Layer w0.4: v1(117.75,12.9) 119.45,12.9 R3.2@119.5,12.9 ; v1(119.6,38.4) 123.63,38.4 JP3.3@123.65,38.38
NetJP3_4: JP3.4 R4.2 | length 3.5
  Bottom Layer w0.4: R4.2@120.55,41.85 121.48,40.92 JP3.4@123.65,40.92
NetJP3_5: JP3.5 R5.2 | length 13.6
  Top Layer w0.4: JP3.5@123.65,43.46 123.84,43.65 127.25,43.65 v1(127.3,43.6)
  Bottom Layer w0.4: R5.2@127.25,34.15 127.25,35.1 126.85,35.5 126.85,37.65 127.25,38.05 127.25,43.55 v1(127.3,43.6)
NetJP4_2: JP4.2
NetJP4_3: JP4.3 JP6.6 | length 15.8
  Bottom Layer w0.4: JP4.3@-55.92,5 -54.82,3.9 -48.2,3.9 -46,1.7 -46,-1.15 -45.11,-2.04 JP6.6@-44.72,-2.04
NetJP5_2: JP5.2 X47.1 | length 60.7
  Top Layer w0.4: X47.1@106.75,43.45 106.75,43.5 X47.1@106.775,43.475 ; JP5.2@117.71,-0.55 117.71,1.91 121,5.2 121,13.9 120.15,14.75 120.15,36.7 120.9,37.45 120.9,43.6 v1(120.65,43.85)
  Bottom Layer w0.4: X47.1@106.75,43.45 107.15,43.85 v1(120.65,43.85)
NetJP5_3: JP5.3 X31.1 | length 61.8
  Top Layer w0.5: v1(97.7,13.45) 114.55,13.45 v1(114.65,13.55)
  Bottom Layer w0.4: X31.1@96.75,43.45 96.75,41.55 97.55,40.75 97.55,13.6 v1(97.7,13.45) ; v1(114.65,13.55) 114.65,-0.05 115.16,-0.56 JP5.3@115.2,-0.6
NetJP7_1: JP7.1 R53.2 | length 2.7
  Top Layer w0.4: R53.2@-22.28,-0.75 -19.609,-0.75 JP7.1@-19.6,-0.75
NetJP7_2: JP7.2 JP7.3 X10.1 | length 22.1
  Top Layer w0.4: X10.1@-22,16 -22.9,15.1 -22.9,11.95 -20.95,10 -20.95,3.65 ; -21,3.65 -20.95,3.65 ; JP7.3@-14.529,-0.711 JP7.2@-17.069,-0.711 -20.95,3.17 -20.95,3.65
NetJP8_1: JP8.1 JP9.6 JP9.7 Q11.3 R81.2 S6.2 X35.1 X36.1 | length 138.5
  Top Layer w0.3: R81.2@107.327,-0.526 107.315,-0.515 107.315,0.115 v1(108.5,1.3) ; v1(108.95,7.4) 109.1,7.55 117.3,7.55 v1(117.5,7.35) ; v1(124.2,7.45) 124.2,6.85 124.85,6.2 JP9.7@128.3,6.2
  Top Layer w0.4: JP8.1@92,35.2 92.95,34.25 97.95,34.25 v1(98.6,34.9) ; v1(98.45,2.75) 98.6,2.9 X36.1@101.05,2.9 102.85,2.9 104.35,1.4 105.4,1.4 107.315,-0.515 R81.2@107.35,-0.55 ; X35.1@99.25,43.45 99.25,44.05 101.25,46.05 121.1,46.05 121.95,45.2 121.95,42.75 122.55,42.15 124.8,42.15 125.791,41.159 S6.2@125.791,40.299 S6.2@131.791,40.299
  Top Layer w0.5: Q11.3@96.3,2.75 96.7,2.75 v1(98.45,2.75)
  Bottom Layer w0.4: v1(98.45,2.75) 98.95,3.25 98.95,10.8 101.9,13.75 101.9,16 101.05,16.85 101.05,19.5 100.45,20.1 100.45,21.5 101.05,22.1 101.05,28.9 100.25,29.7 100.25,31.85 100.8,32.4 100.8,41.35 99.25,42.9 X35.1@99.25,43.45 ; v1(98.6,34.9) 99.15,35.45 100.8,35.45 ; v1(108.5,1.3) 108.6,1.4 108.6,7.05 v1(108.95,7.4) ; v1(117.5,7.35) 118.05,6.8 119.85,6.8 120.5,7.45 v1(124.2,7.45) JP9.6@128.3,7.45 ; S6.2@125.65,40.158 S6.2@125.791,40.299
NetJP9_3: JP9.3 JP9.10 R46.1 X23.1 X24.1 | length 97
  Top Layer w0.3: X24.1@101.05,10.4 102.75,10.4 104.05,11.7 109.9,11.7 v1(110.15,11.45) ; v1(110,2.85) 117.59,2.85 118.85,4.11 v1(118.85,5.25) ; v1(121.8,4.3) 121.8,8.9 122.3,9.4 124.8,9.4 125.475,8.725 JP9.3@128.3,8.725
  Top Layer w0.4: v1@93.6,10.35 93.65,10.4 v1(93.8,10.4) X24.1@101.05,10.4
  Bottom Layer w0.4: X23.1@91.75,43.45 91.75,42.7 93.2,41.25 93.2,29.95 92.5,29.25 92.5,11.65 93.65,10.5 93.65,7.2 v1(94.55,6.3) v1@94.55,6.25 ; v1(110,2.85) 110.15,3 v1(110.15,11.45) ; v1(118.85,5.25) 119.8,4.3 v1(121.8,4.3) 124.525,4.3 125.15,4.925 JP9.10@128.3,4.925
NetJP9_4: JP9.4 JP9.9 R82.2 X27.1 X28.1 | length 83.7
  Top Layer w0.3: X28.1@101,7.9 X28.1@101.05,7.9 102.3,7.9 102.8,8.4 118.65,8.4 118.975,8.075 v1(119,8.05) v1@118.95,8.05 ; v1(119,8.05) 120.05,7 v1(120.05,5.8) ; v1(124.1,5.3) 124.475,4.925 JP9.9@128.3,4.925
  Top Layer w0.4: v1(95.6,29.8) 95.7,29.9 97.85,32.05 R82.2@97.85,32.25 ; v1(96.25,8.9) 96.2,8.85 97.15,7.9 X28.1@101.05,7.9
  Bottom Layer w0.4: X27.1@94.25,43.5 94.225,43.475 94.1,43.35 94.1,31.3 95.525,29.875 v1@95.55,29.85 ; v1@95.5,29.85 v1@95.55,29.85 ; v1(96.25,8.9) 96.25,29.15 v1(95.6,29.8) ; v1(119,8.05) 119.675,8.725 JP9.4@128.3,8.725 ; v1(120.05,5.8) 121.15,5.8 121.6,5.35 124.05,5.35 v1(124.1,5.3) ; v1@95.55,29.85 95.6,29.85 v1(95.6,29.8) ; v1@95.55,29.85 v1(95.6,29.8)
NetJP9_5: 
NetK1_5: K1.5 Q6.3 | length 15.3
  Top Layer w0.4: v1(-34.15,28) -34.144,27.994 K1.5@-34.144,22.09 ; v1(-26.5,30.25) Q6.3@-26.5,31.05
  Bottom Layer w0.4: v1(-34.15,28) -28.85,28 -26.6,30.25 v1(-26.5,30.25)
NetL102_1: 
NetQ1_1: Q1.1 R34.2 R36.2 | length 4.7
  Top Layer w0.4: -77.45,101 -77.45,102.6 R36.2@-77.45,102.75 ; R36.2@-77,102.8 R34.2@-74.1,102.8
NetQ2_1: Q2.1 R10.2 | length 6.3
  Top Layer w0.4: R10.2@-11.793,103.888 -11.281,104.4 -8.55,104.4 -8.1,103.95 -8.1,103.4 -6.974,102.275 -6.95,102.25 Q2.1@-6.996,102.25
NetQ2_3: Q2.3 U2.2 | length 7.7
  Top Layer w0.5: Q2.3@-9.15,103.2 -9.15,95.631 -9.15,95.618 -9.113,95.581 U2.2@-9.063,95.531
NetQ3_1: Q3.1 R14.2 | length 2.7
  Top Layer w0.4: R14.2@-19,103.65 -17.104,103.65 Q3.1@-16.502,103.048
NetQ3_3: Q3.3 R10.1 | length 2.9
  Top Layer w0.5: Q3.3@-14.302,102.098 -13.098,102.098 -12.087,101.088 R10.1@-11.793,101.088
NetQ4_1: Q4.1 R89.1 R90.2 | length 5.7
  Top Layer w0.5: R89.1@-29.6,100.45 -26.8,100.45 -24.5,100.45 Q4.1@-24.05,100.9
NetQ4_2: Q4.2 U2.3 | length 15.4
  Top Layer w0.25: Q4.2@-22.15,100.9 -22.15,99.4 v1(-22.1,99.35)
  Top Layer w0.4: U2.3@-11.603,95.531 U2.3@-11.603,95.631 -11.603,98.547 v1(-11.6,98.55)
  Bottom Layer w0.4: v1(-22.1,99.35) -16.6,99.35 -15.8,98.55 v1(-11.6,98.55)
NetQ5_1: Q5.1 R31.1 R32.1 | length 6
  Top Layer w0.4: R31.1@-18.9,44.6 -18.95,44.6 -18.925,44.625 -18.5,45.05 -16.104,45.05 -13.9,45.05 Q5.1@-13.395,44.546
NetQ5_3: Q5.3 U3.17 X2.1 | length 39.8
  Top Layer w0.25: U3.17@-10.289,49.105 -4.792,43.607 -4.75,43.565 v1@-4.75,43.55
  Top Layer w0.4: v1(-11.6,45.3) -11.25,44.95 Q5.3@-11.25,43.65 ; Q5.3@-11.2,43.6 Q5.3@-11.195,43.596 ; X2.1@-0.4,26.8 -0.4,37.75 v1(2,40.15)
  Bottom Layer w0.4: v1(-11.6,45.3) -11.4,45.1 v1@-11.15,45.1 ; v1@-11.2,45.15 v1@-11.15,45.1 ; v1@-4.75,43.55 -4.7,43.55 -1.4,43.55 -0.9,43.05 v1(2,40.15) ; v1(-4.7,43.7) -6.1,45.1 v1@-11.15,45.1
NetQ6_1: Q6.1 R35.2 R58.2 | length 8.4
  Top Layer w0.4: R35.2@-26.904,41.409 -26.904,38.999 R58.2@-26.896,38.991 -25.354,37.449 Q6.1@-25.354,33.696
NetQ7_1: Q7.1 R74.1 U10.1 | length 23.4
  Top Layer w0.4: R74.1@97.608,40.207 98.4,41 105.95,41 v1(107,39.95) ; U10.1@101.95,38.375 101.95,41 ; v1(110.3,34.65) 110.7,35.05 v1(110.7,39.65)
  Bottom Layer w0.4: v1(107,39.95) 107.3,39.65 v1(110.7,39.65) ; Q7.1@108.748,34.4 110.05,34.4 v1(110.3,34.65)
NetQ7_2: Q7.2 U10.4 | length 18.5
  Top Layer w0.4: U10.4@100.05,36.225 100.05,34.85 99.2,34 99.2,30.3 100.4,29.1 104.6,29.1 106.85,31.35 v1(106.85,32.95)
  Bottom Layer w0.4: Q7.2@106.848,34.498 106.848,32.952 v1(106.85,32.95)
NetQ11_1: Q11.1 R79.2 R80.1 | length 4.7
  Top Layer w0.4: R80.1@91.8,6.55 91.8,6.4 91.8,4.6 91.8,4.5 91.85,4.45 92.2,4.45 92.7,4.45 93.45,3.7 Q11.1@94.15,3.7
NetQ700_1: Q700.1 Q701.1 R704.1 | length 34.5
  Top Layer w0.6: v1(34.505,81.3) R704.1@52.836,81.3
  Top Layer w1: Q700.1@24.403,82.451 Q701.1@24.403,85.154
  Bottom Layer w1: Q700.1@24.455,82.4 24.455,80.8 26.455,78.8 32.005,78.8 ; 32.005,78.8 v1(34.505,81.3)
NetQ700_3: Q700.3 Q701.3 R708.1 R710.1 R711.1 R712.1 R713.1 R714.1 R715.1 R716.1 | length 71.3
  Top Layer w0.6: Q700.3@29.483,82.429 31.933,82.429 32.955,83.45 60.01,83.45 R708.1@61.048,82.412
  Top Layer w1: Q700.3@29.483,82.429 Q701.3@29.483,85.154
  Top Layer w1.5: 15.717,76.753 R716.1@15.717,95.203 ; R712.1@15.717,81.366 19.189,81.366 21.805,78.75 28.205,78.75 29.455,80 Q700.3@29.455,82.4
NetR1_1: R1.1 S1.2 | length 20.7
  Bottom Layer w0.4: S1.2@104.4,24.05 116.9,24.05 124.1,24.05 124.675,23.475 R1.1@124.8,23.35
NetR2_1: R2.1 S2.2 | length 12.5
  Bottom Layer w0.4: S2.2@104.35,38.45 104.38,38.48 113.65,38.48 S2.2@116.85,38.48
NetR3_1: R3.1 S3.2 | length 15.2
  Top Layer w0.5: S3.2@104.35,9.9 S3.2@116.85,9.9
  Bottom Layer w0.5: S3.2@116.9,9.95 116.89,9.94 116.85,9.9 119.4,9.9 R3.1@119.45,9.95
NetR4_1: R4.1 S4.2 | length 58.4
  Top Layer w0.4: S4.2@99.03,15.35 99.08,15.3 117.7,15.3 118.5,16.1 118.5,39.9 v1(118.4,40)
  Bottom Layer w0.4: S4.2@98.95,27.85 98.95,15.43 S4.2@99.03,15.35 ; R4.1@117.75,41.85 118.4,41.2 v1(118.4,40)
NetR5_1: R5.1 S5.2 | length 15.7
  Bottom Layer w0.4: S5.2@127.3,15.45 127.3,27.95 R5.1@127.3,31.2
NetR29_1: R29.1 R30.1 X18.1 | length 79.4
  Top Layer w0.4: v1(-48.05,17.4) v1(-48.05,23.75)
  Top Layer w0.5: R29.1@-46.093,31.888 -46.093,31.343 -45.2,30.45 v1(-45.2,23.7) ; v1@-33,23.5 v1(-32.85,23.65)
  Bottom Layer w0.5: v1(-48.05,17.4) -47.95,17.3 -32.3,17.3 -31.05,18.55 -1.4,18.55 -0.4,19.55 X18.1@-0.4,20 ; v1(-48.05,23.75) -48,23.7 v1(-45.2,23.7) v1@-32.9,23.7
NetR33_1: R33.1 U3.39 | length 8.2
  Top Layer w0.25: R33.1@-15.496,64.491 -15.496,57.846 -14.5,56.85 U3.39@-14.426,56.777
NetR37_1: R37.1 R69.2 U3.26 X20.1 | length 102.5
  Top Layer w0.25: U3.26@-8.2,53.9 -8.16,53.94 -6.025,56.075 ; -6,56.05 -5.1,56.95 -5.1,61.6 -5.525,62.025 v1(-5.55,62.05) ; v1@-5.5,62.05 -5.525,62.075 -6.05,62.6 -6.05,63.95 -5.35,64.65 -1.05,64.65 0.15,65.85 0.15,66.891 R37.1@0.15,66.95
  Top Layer w0.4: v1(-27.8,61.9) -27.8,59.85 -28.206,59.444 -28.5,59.15 -28.5,55.7 -28.25,55.45 -28.25,54.15 -28.5,53.9 -28.5,28.15 -29.1,27.55 -29.1,21.35 -27.8,20.05 X20.1@-26.2,20.05
  Bottom Layer w0.4: R69.2@-40.9,59.3 -40.9,59.397 -40.9,59.45 -39.6,60.75 -34.2,60.75 -33.3,59.85 -30.75,59.85 -30.15,60.45 -30.15,61.1 -29.35,61.9 v1(-27.8,61.9) ; v1@-27.85,61.85 -27.8,61.85 v1@-27.7,61.85 ; v1@-27.8,61.95 -27.775,61.925 v1@-27.7,61.85 ; v1(-5.55,62.05) v1@-5.5,62.05 ; v1@-5.5,61.85 -5.55,61.85 v1@-27.7,61.85
NetR38_1: R38.1 R70.2 U3.28 X19.1 | length 89.5
  Top Layer w0.25: U3.28@-8.9,54.6 -8.86,54.64 -6.45,57.05 -6.45,60.25 v1(-6.9,60.7)
  Top Layer w0.4: R38.1@-32.291,52.004 v1@-32.291,53.241 ; v1(-29.05,19.7) -29.05,20 -30.05,21 -30.05,27.8 -29.25,28.6 -29.25,53.25 -29.25,60.45 v1(-29.05,60.65)
  Bottom Layer w0.4: R70.2@-35.297,59.397 -33.997,59.397 -33.6,59 -30.4,59 -29.05,60.35 v1(-29.05,60.65) -27.35,60.65 -26.85,61.15 -7.35,61.15 v1(-6.9,60.7) ; v1@-32.291,53.241 -29.6,53.241 -29.541,53.241 v1@-29.5,53.2 ; v1@-29.1,19.7 v1(-29.05,19.7) -27.45,21.3 -24.95,21.3 X19.1@-23.7,20.05
  other v1: -32.3,53.25 -29.6,53.25
NetR39_1: R39.1 U3.27 | length 17.4
  Top Layer w0.25: U3.27@-8.522,54.302 -5.6,57.224 -5.6,60.75 -6.6,61.75 -6.6,64.15 -5.5,65.25 -2.85,65.25 -2.7,65.4 -2.7,66.891 R39.1@-2.7,66.95
NetR40_2: R40.2 U7.7 | length 3.9
  Top Layer w0.4: R40.2@-26.3,80 -26.265,80.035 U7.7@-26.265,83.85
NetR41_2: R41.2 U7.5 | length 4
  Top Layer w0.4: R41.2@-29.05,80 -29.1,80 -28.805,80.295 U7.5@-28.805,83.85
NetR42_1: R42.1 U3.21 | length 10.4
  Top Layer w0.25: U3.21@-8.875,50.519 -6.553,48.196 R42.1@0.591,48.196
NetR43_2: 
NetR43_2: R43.2 U15.2 | length 5.6
  Top Layer w0.5: R43.2@-38.55,3.45 -37.2,3.45 -36.485,2.735 U15.2@-33.2,2.735
NetR44_1: R44.1 U3.20 | length 11.8
  Top Layer w0.25: U3.20@-9.229,50.165 -4.613,45.55 0.591,45.55 R44.1@0.65,45.55
NetR45_1: R45.1 U3.7 | length 11.2
  Top Layer w0.25: R45.1@-21.85,42.3 -21.809,42.3 -20.9,42.3 -20.35,42.85 -20.35,46 -20.1,46.25 -18.695,46.25 U3.7@-15.487,49.458
NetR47_2: R47.2 U14.10 U15.8 | length 38.6
  Top Layer w0.4: U15.8@-28,4.005 -26.455,4.005 v1(-26.05,3.6) ; U14.10@-9.5,13.55 U14.10@-9.55,13.5 ; v1(-5.8,5.3) -5.8,8.45 -9.55,12.2 -9.55,13.4 U14.10@-9.55,13.5 ; R47.2@-5.25,15.1 -9.2,15.1 -9.55,14.75 U14.10@-9.55,13.5
  Bottom Layer w0.4: v1(-26.05,3.6) -24.35,5.3 v1(-5.8,5.3)
NetR48_1: R48.1 U16.3 | length 10.7
  Top Layer w0.4: U16.3@-27.95,13.75 -26.2,13.75 -26.1,13.65 -26.1,12.15 -24.95,11 -23.95,11 -22.35,9.4 R48.1@-22.35,6.95
NetR49_2: R49.2 U3.24 | length 5.3
  Top Layer w0.25: U3.24@-7.814,51.579 -7.385,51.15 -4.362,51.15 R49.2@-3.212,52.3 ; R49.2@-3.25,52.3 R49.2@-3.212,52.3 ; R49.2@-3.204,52.309 R49.2@-3.212,52.3
NetR52_1: R52.1 U16.1 | length 32.8
  Top Layer w0.4: U16.1@-28,11.295 -26.164,11.295 -25.219,10.35 -24.7,10.35 -23.85,9.5 v1(-23.85,1.85) ; R52.1@-8.15,-0.1 -6.7,-0.1 v1(-6.3,0.3)
  Bottom Layer w0.4: v1(-23.85,1.85) -23.55,1.55 -7.55,1.55 v1(-6.3,0.3)
NetR52_2: R52.2 X6.1 | length 3.6
  Top Layer w0.4: X6.1@-12,3 -12,0.85 -11.025,-0.125 R52.2@-11,-0.15
NetR53_1: R53.1 U8.1 | length 8.3
  Top Layer w0.4: U8.1@-27.3,5.695 -26.145,5.695 -24.7,4.25 -24.7,2.95 -25.1,2.55 R53.1@-25.1,-0.7
NetR72_1: R72.1 U5.3 | length 3.5
  Top Layer w0.4: U5.3@-50.2,102.95 -47.85,102.95 R72.1@-47.05,102.15
NetR73_2: R73.2 U5.7 | length 2.9
  Top Layer w0.4: R73.2@-58.5,102.6 -57.615,101.715 U5.7@-55.95,101.715
NetR305_2: R305.2 X307.1 | length 24.3
  Top Layer w0.5: R305.2@103.944,99.462 105.856,97.55 108.05,97.55 108.75,98.25 108.75,101.65 110.6,103.5 110.6,103.6 111.2,104.2 113.85,104.2 114.95,103.1 114.95,99.1 117.2,96.85 117.2,96.8 X307.1@117.2,96.75
NetR306_2: R306.2 X308.1 | length 27.9
  Top Layer w0.4: 118.45,98.05 v1(118.45,103.55) v1@118.45,103.7
  Top Layer w0.5: v1(105.4,104.35) 105.5,104.35 105.5,101.043 R306.2@107.044,99.5 ; R306.2@107.044,99.462 R306.2@107.044,99.5 ; R306.2@107.044,99.693 R306.2@107.044,99.5 ; 118.45,98.05 X308.1@119.65,96.85
  Bottom Layer w0.5: v1(105.4,104.35) 107.1,102.65 109.6,102.65 111.15,104.2 115.2,104.2 115.9,103.5 118.45,103.5 v1(118.45,103.55)
NetR702_2: R702.2 U702.5 | length 26.5
  Top Layer w0.6: R702.2@55.342,54.793 v2@59.048,54.793 ; U702.5@58.262,76.139 v1@59.544,76.139
  Bottom Layer w0.6: v2(59.105,54.85) 59.105,72.35 59.605,72.85 v1(59.605,76.2)
NetR704_2: R704.2 U702.7 | length 5.1
  Top Layer w0.6: U702.7@55.692,76.169 R704.2@55.692,81.243
NetR705_1: R705.1 R709.2 U702.3 | length 16.2
  Top Layer w0.6: R709.2@50.192,73.543 58.998,73.543 59.298,73.843 R705.1@63.692,73.843 ; U702.3@56.992,70.939 56.992,73.481
NetU3_13: U3.13 X16.1 | length 37.7
  Top Layer w0.25: U3.13@-11.704,47.69 -8.7,44.687 -8.7,41.95 v1(-8.85,41.8)
  Top Layer w0.4: X16.1@-26.2,26.8 -23.8,29.2 -23.8,40.15 -24.125,40.475 v1@-24.15,40.5
  Bottom Layer w0.4: v1@-24.15,40.5 -23.2,41.45 v1@-8.85,41.45
  other v1: -24.2,40.4
NetU3_14: U3.14 X3.1 | length 39.8
  Top Layer w0.25: U3.14@-11.35,48.044 -7.5,44.194 v1(-7.5,43)
  Top Layer w0.4: v1@-24.1,42.15 -24.07,42.12 -24.07,41.87 -23,40.8 -23,27.6 -23.7,26.9 X3.1@-23.7,26.8 ; v1(-24.1,42.2) -24.05,42.15 v1@-24,42.15
  Bottom Layer w0.4: v1(-24.1,42.2) -23.8,42.5 -10.45,42.5 -9.95,43 v1(-7.5,43)
NetU3_16: 
NetU4_1: 
NetU4_12: 
NetU4_13: 
NetU4_14: 
NetU5_2: 
NetU11_12: 
NetU14_7: U14.7 X8.1 | length 20.2
  Top Layer w0.4: U14.7@-9.525,8.2 -9.525,7.325 -8.65,6.45 v1(-7.05,6.45) ; X8.1@-2,16 -2,15.75 -0.6,14.35 -0.6,7.4 v1(-0.35,7.15)
  Bottom Layer w0.4: v1(-7.05,6.45) -6.35,7.15 v1(-0.35,7.15)
NetU14_8: U14.8 X4.1 | length 16.6
  Top Layer w0.4: U14.8@-8.255,8.2 -7.35,8.2 v1(-7.3,8.25) ; X4.1@0.5,16 0.55,15.95 v1(0.55,8.25)
  Bottom Layer w0.4: v1(-7.3,8.25) v1(0.55,8.25)
NetU14_9: U14.9 U16.4 | length 25
  Top Layer w0.4: U16.4@-28.15,15.105 v1@-28.15,15.95 ; U14.9@-8.255,13.4 -7.3,13.4 v1(-7.05,13.65)
  Bottom Layer w0.4: v1(-28.2,16) -25.85,13.65 -21.95,13.65 -21.1,14.5 -19.4,14.5 -18.55,13.65 v1(-7.05,13.65)
NetU19_4: 
NetU700_4: U700.4 U700.5 | length 5.2
  Top Layer w0.5: U700.5@24.192,37.453 U700.4@29.392,37.453
NetX33_1: X33.1
OFF1: JP1.19 R54.2 | length 57.4
  Top Layer w0.4: v1(-48.95,53.9) -48.9,53.85 -48.9,47.6 -48.35,47.05 -48.35,37.3 -47.95,36.9 v1(-47.95,32.6) ; v1(-41.85,53.25) -41.436,52.836 R54.2@-41.436,52.136 ; R54.2@-41.45,52.15 R54.2@-41.436,52.136 ; R54.2@-41.4,52.1 R54.2@-41.436,52.136
  Bottom Layer w0.4: JP1.19@-74.88,32.545 -48.005,32.545 v1(-47.95,32.6) ; v1(-48.95,53.9) -42.65,53.9 -42.5,53.9 v1(-41.85,53.25)